# Altium PCB CardioBit 12-Lead PoC Routed PCB.pcbdoc (part 1 of 2)
Units mm, origin at the board's own origin, x right, y up, seen from the top; angles counter-clockwise.
Board outline 307.5 x 200 mm, 2 copper layers (Top Layer, Bottom Layer); 149 components, 164 nets, 497 pads, 199 vias.
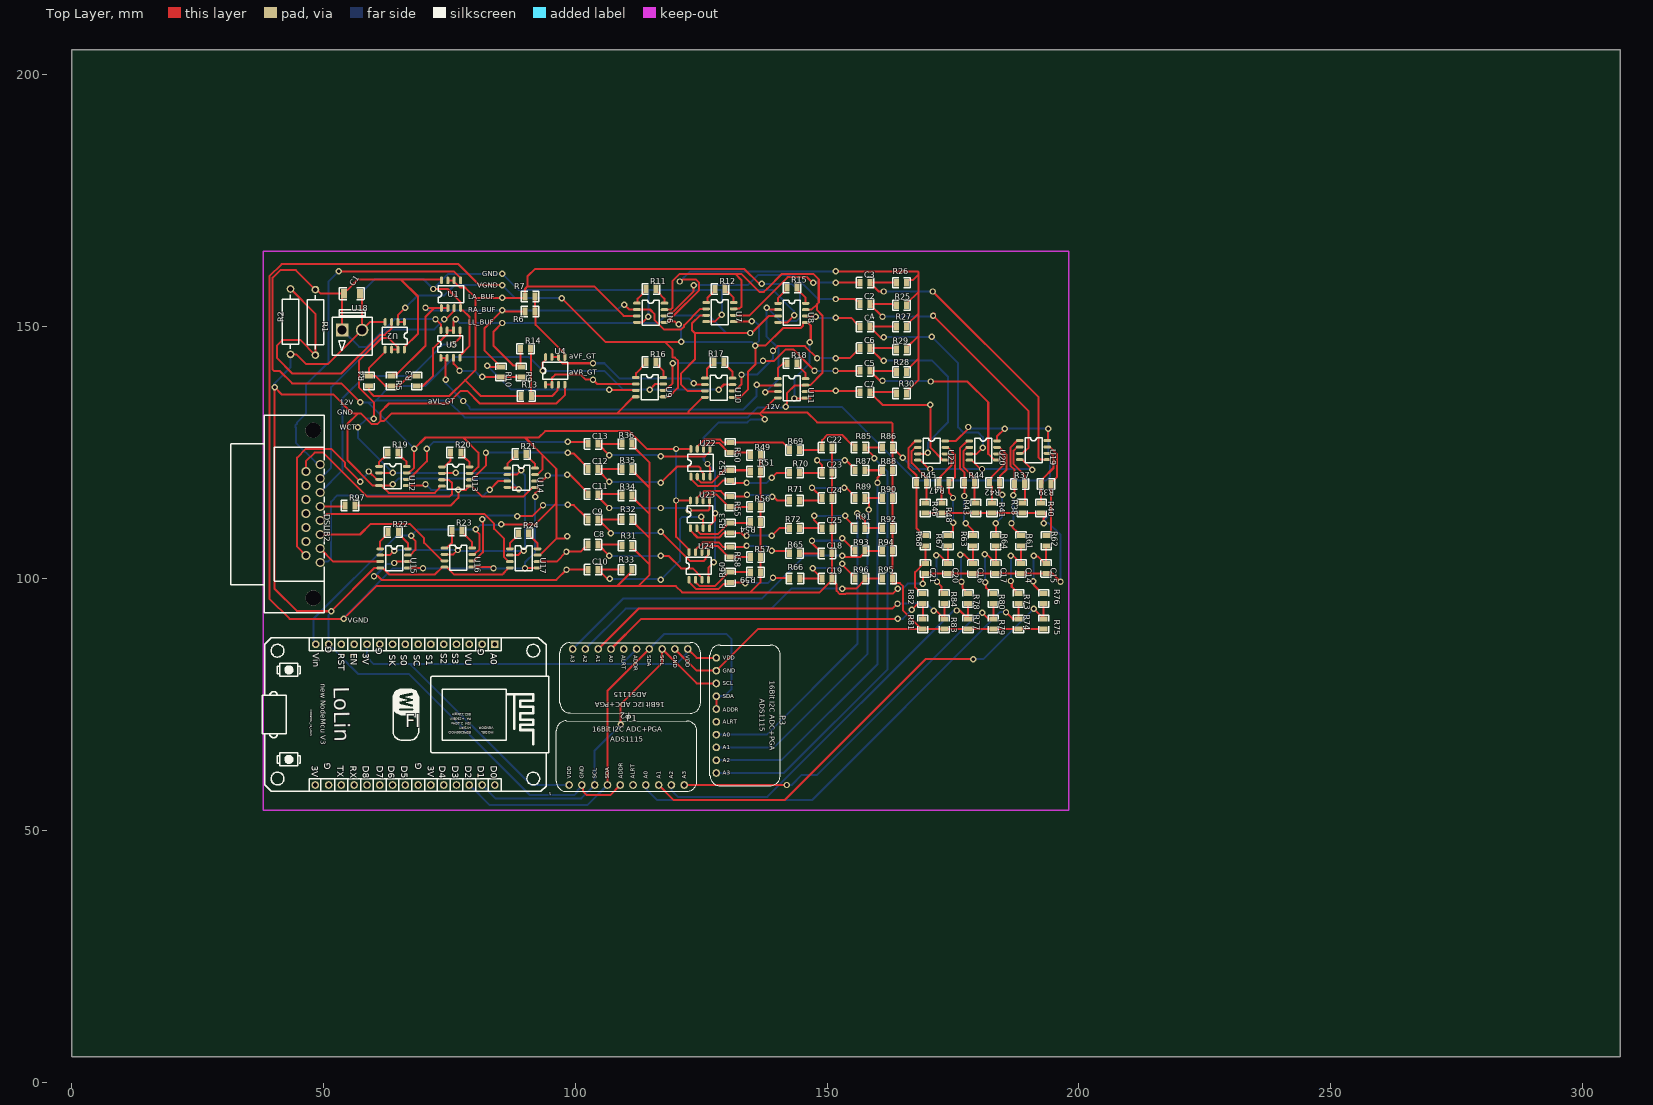
[diagram p0: Top Layer view]
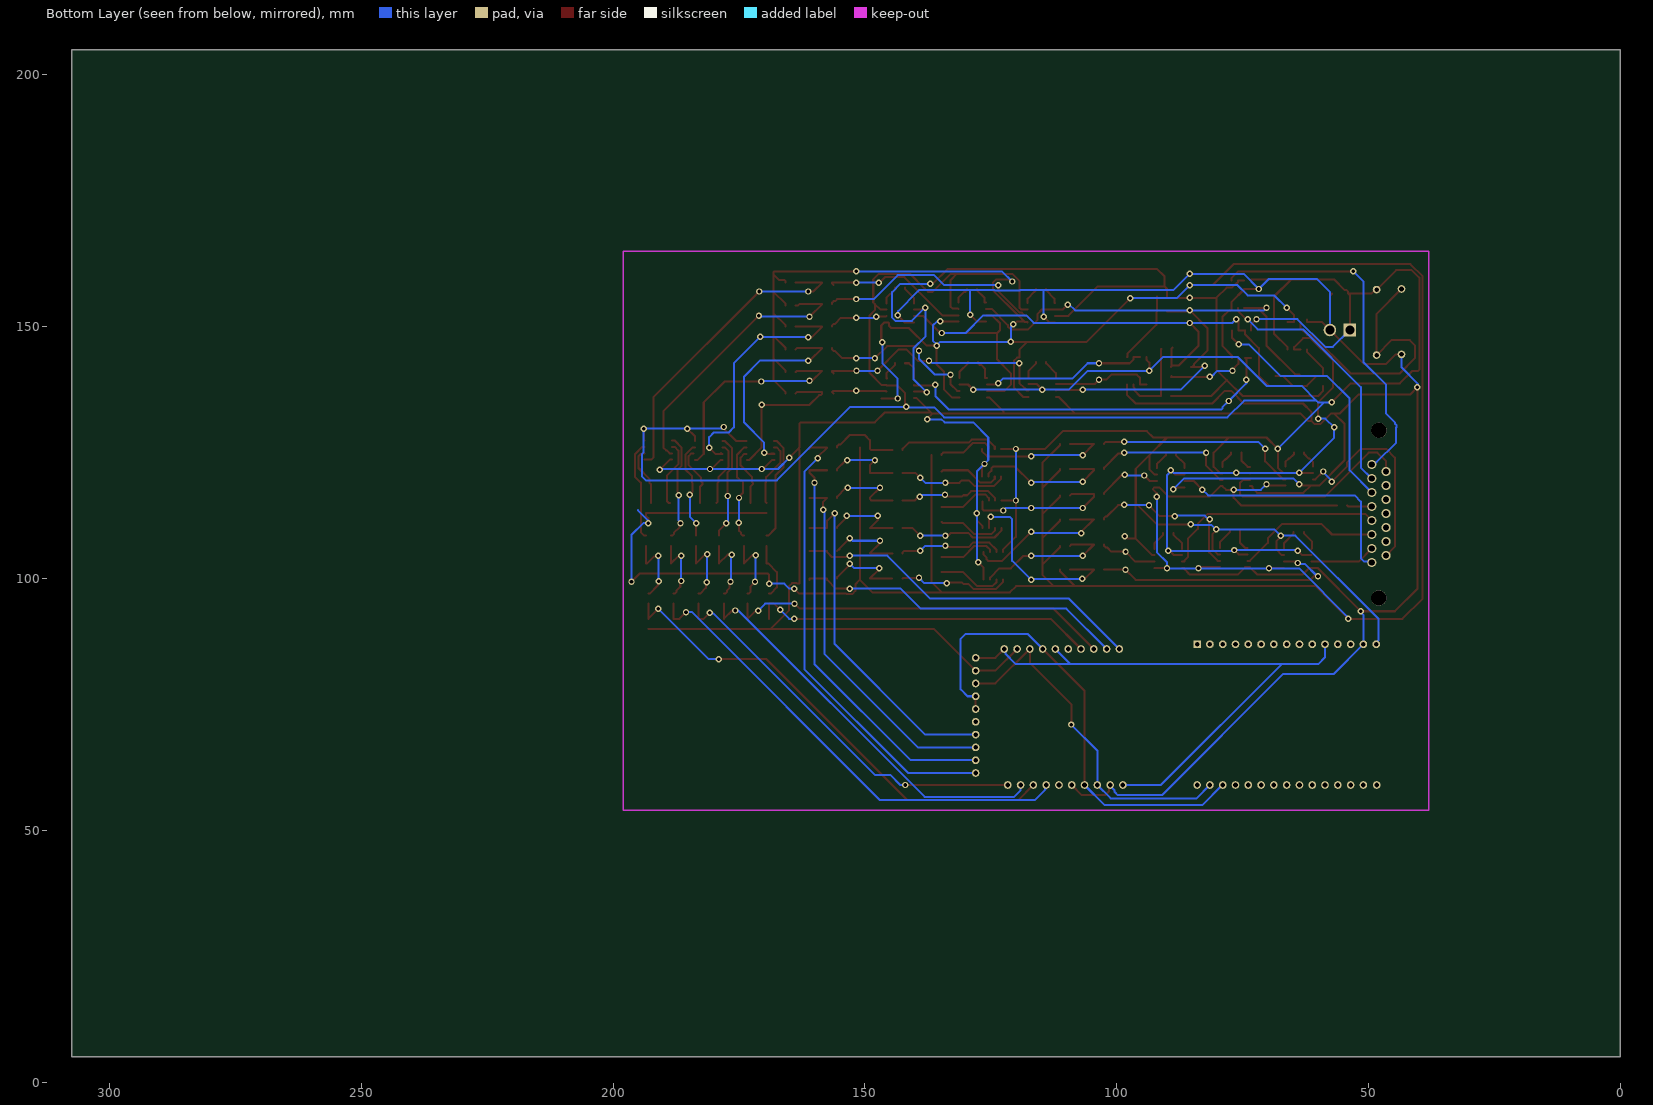
[diagram p1: Bottom Layer view, seen from below]

## Layer stack, top to bottom
Top Solder: solder mask 0.0102, Solder Resist, Dk 3.5
Top Layer: signal copper 0.0356
Dielectric1: dielectric 0.32, FR-4, Dk 4.8
Bottom Layer: signal copper 0.0356
Bottom Solder: solder mask 0.0102, Solder Resist, Dk 3.5

## Board outline
0,5 0,205 307.5,205 307.5,5

## Design rules (kind name [scope] priority, off if disabled: settings)
Clearance [All] p1: gap=0.254 ignorepadtopadclearanceinfootprint=FALSE except(0: Arc-Hole Track-Hole SMDPad-Hole THPad-Hole Via-Hole Fill-Hole Poly-Hole Region-Hole Text-Hole)
HoleSize [All] p1: absolutevalues=TRUE maxlimit=2.54 minlimit=0.3 maxpercent=80.000 minpercent=20.000
HoleToHoleClearance [All] p1: gap=0.3 allowstackedmicrovias=TRUE
MinimumSolderMaskSliver [All] p1: minsoldermaskwidth=0.3
PolygonConnect [All] p1: connectstyle=Relief reliefconductorwidth=0.254 reliefentries=4 polygonreliefangle="90 Angle" airgapwidth=0.254
RoutingVias [All] p1: holewidth=0.711 width=1.27 viastyle="Through Hole" minholewidth=0.711 minwidth=1.27 maxholewidth=0.711 maxwidth=1.27
SilkToSilkClearance [All] p1: silktosilkclearance=0.3
SilkToSolderMaskClearance [IsPad] p1: minsilkscreentomaskgap=0.3 clearancetoexposedcopper=TRUE
SolderMaskExpansion [All] p1: expansion=0.102 istentingtop=FALSE
Width [All] p1: maxlimit=0.5 minlimit=0.3 preferedwidth=0.4
25 further rules are at their usual default settings.

## Components (designator, comment, footprint, x,y, rotation, side; value= is the part's Value field where it differs from the comment)
C1 "1uF" C1206 55.626,156.591 r0 top
C2 "10uF" C0805 157.5,154.5 r0 top
C3 "10uF" C0805 157.5,158.75 r0 top
C4 "10uF" C0805 157.5,150 r0 top
C5 "10uF" C0805 157.5,141.25 r0 top
C6 "10uF" C0805 157.5,145.75 r0 top
C7 "10uF" C0805 157.5,137 r0 top
C8 "10uF" C0805 103.5,106.75 r0 top
C9 "10uF" C0805 103.5,111.75 r0 top
C10 "10uF" C0805 103.5,101.75 r0 top
C11 "10uF" C0805 103.5,116.75 r0 top
C12 "10uF" C0805 103.5,121.75 r0 top
C13 "10uF" C0805 103.5,126.75 r0 top
C14 "1uF" C0805 188.5,102 r270 top
C15 "1uF" C0805 193.5,102 r270 top
C16 "1uF" C0805 179,102 r270 top
C17 "1uF" C0805 183.5,102 r270 top
C18 "1uF" C0805 150,105 r0 top
C19 "1uF" C0805 150,100 r0 top
C20 "1uF" C0805 174,102 r270 top
C21 "1uF" C0805 169.5,102 r270 top
C22 "1uF" C0805 150,126 r0 top
C23 "1uF" C0805 150,121 r0 top
C24 "1uF" C0805 150,116 r0 top
C25 "1uF" C0805 150,110 r0 top
DSUB2 "DS1037-15FNAKT76-0CC" DSUB-TH_DS1037-15FN 47.92,112.909 r270 top
P1 "ADS1115" "ADS1115 BREAKOUT BOARD NO HOLES" 95.966,57.73 r0 top
P2 "ADS1115" "ADS1115 BREAKOUT BOARD NO HOLES" 125.114,87.27 r180 top
P3 "ADS1115" "ADS1115 BREAKOUT BOARD NO HOLES" 126.73,87.034 r270 top
R1 "100K" RES-TH_BD3.3-L9.0-P13.00-D0.6 48.387,150.876 r270 top
R2 "100K" RES-TH_BD3.3-L9.0-P13.00-D0.6 43.434,151.003 r90 top
R3 "1K" R0805#1 68.5,139.25 r90 top
R4 "1K" R0805#1 59,139.25 r90 top
R5 "1K" R0805#1 63.5,139.25 r270 top
R6 "1K" R0805#1 91,153 r180 top
R7 "1K" R0805#1 91,156 r180 top
R9 "1K" R0805#1 89.25,141 r270 top
R10 "1K" R0805#1 85.25,141 r270 top
R11 "10K" R0805#1 115,157.5 r0 top
R12 "10K" R0805#1 128.75,157.5 r0 top
R13 "1K" R0805#1 90.25,136.25 r0 top
R14 "1K" R0805#1 90.125,145.625 r0 top
R15 "10K" R0805#1 143,157.75 r0 top
R16 "10K" R0805#1 115,143 r0 top
R17 "10K" R0805#1 128.5,143 r0 top
R18 "10K" R0805#1 143,142.75 r0 top
R19 "10K" R0805#1 63.75,125 r0 top
R20 "10K" R0805#1 76.25,125 r0 top
R21 "10K" R0805#1 89.25,124.75 r0 top
R22 "10K" R0805#1 63.837,109.225 r0 top
R23 "8.2K" R0805#1 76.5,109.5 r0 top
R24 "8.2K" R0805#1 89.75,109 r0 top
R25 "300K" R0805#1 164.75,154.25 r180 top
R26 "300K" R0805#1 164.75,158.75 r180 top
R27 "300K" R0805#1 164.75,150 r180 top
R28 "300K" R0805#1 164.75,141 r180 top
R29 "300K" R0805#1 164.75,145.5 r180 top
R30 "300K" R0805#1 164.75,136.75 r180 top
R31 "300K" R0805#1 110.25,106.5 r180 top
R32 "300K" R0805#1 110.25,111.75 r180 top
R33 "300K" R0805#1 110.25,101.75 r180 top
R34 "300K" R0805#1 110.25,116.5 r180 top
R35 "300K" R0805#1 110.25,121.75 r180 top
R36 "300K" R0805#1 110.25,126.75 r180 top
R37 "25K" R0805#1 188.25,118.75 r0 top
R38 "150" R0805#1 188.75,114 r90 top
R39 "25K" R0805#1 193.5,118.75 r180 top
R40 "150" R0805#1 192.5,114 r270 top
R41 "150" R0805#1 182.75,114 r270 top
R42 "25K" R0805#1 183.25,119 r180 top
R43 "150" R0805#1 179.5,114 r90 top
R44 "25K" R0805#1 178.25,119 r0 top
R45 "25K" R0805#1 168.75,119 r0 top
R46 "150" R0805#1 169.5,114 r90 top
R47 "25K" R0805#1 173.25,119 r180 top
R48 "150" R0805#1 172.75,114 r270 top
R49 "150" R0805#1 135.75,124.5 r0 top
R50 "25K" R0805#1 130.75,126 r270 top
R51 "150" R0805#1 135.75,121.25 r180 top
R52 "25K" R0805#1 130.75,120.5 r90 top
R53 "25K" R0805#1 130.75,110 r90 top
R54 "150" R0805#1 135.75,111.25 r180 top
R55 "25K" R0805#1 130.75,115.25 r270 top
R56 "150" R0805#1 135.75,114.25 r0 top
R57 "150" R0805#1 135.75,104.25 r0 top
R58 "25K" R0805#1 130.75,105.25 r270 top
R59 "150" R0805#1 135.75,101.25 r180 top
R60 "25K" R0805#1 130.75,100.25 r90 top
R61 "2K" R0805#1 188.5,107.5 r90 top
R62 "2K" R0805#1 193.5,107.5 r90 top
R63 "2K" R0805#1 179,107.5 r90 top
R64 "2K" R0805#1 183.5,107.5 r90 top
R65 "2K" R0805#1 143.5,105 r180 top
R66 "2K" R0805#2 143.592,100 r180 top
R67 "2K" R0805#1 174,107.5 r90 top
R68 "2K" R0805#1 169.5,107.5 r90 top
R69 "2K" R0805#1 143.5,125.5 r180 top
R70 "2K" R0805#1 143.5,121 r180 top
R71 "2K" R0805#1 143.5,115.5 r180 top
R72 "2K" R0805#1 143.5,110 r180 top
R73 "30K" R0805#1 188,96 r90 top
R74 "10K" R0805#1 188,91 r90 top
R75 "10K" R0805#1 193,91 r90 top
R76 "30K" R0805#1 193,96 r90 top
R77 "10K" R0805#1 178,91 r90 top
R78 "30K" R0805#1 178,96 r90 top
R79 "10K" R0805#1 183,91 r90 top
R80 "30K" R0805#1 183,96 r90 top
R81 "10K" R0805#1 169,91 r90 top
R82 "30K" R0805#1 169,96 r90 top
R83 "10K" R0805#1 173.265,90.987 r90 top
R84 "30K" R0805#1 173.265,96.067 r90 top
R85 "30K" R0805#1 156.5,126 r180 top
R86 "10K" R0805#1 162,126 r180 top
R87 "30K" R0805#1 156.5,121.5 r180 top
R88 "10K" R0805#1 162,121.5 r180 top
R89 "30K" R0805#1 156.5,116 r180 top
R90 "10K" R0805#1 162,116 r180 top
R91 "30K" R0805#1 156.5,110 r180 top
R92 "10K" R0805#1 162,110 r180 top
R93 "30K" R0805#1 156.5,105.5 r180 top
R94 "10K" R0805#1 162,105.5 r180 top
R95 "10K" R0805#1 162,100 r180 top
R96 "30K" R0805#1 156.5,100 r180 top
R97 "300K" R0805#1 55.25,114.5 r0 top
U1 "LM358D" SOIC-8_L5.0-W4.0-P1.27-LS6.0-BL 75.311,156.464 r0 top
U2 "LM358D" SOIC-8_L5.0-W4.0-P1.27-LS6.0-BL 64.135,148.209 r180 top
U4 "LM358D" SOIC-8_L5.0-W4.0-P1.27-LS6.0-BL 96,141.25 r0 top
U5 "LM358D" SOIC-8_L5.0-W4.0-P1.27-LS6.0-BL 75.184,146.558 r0 top
U6 "AD623ARZ-R7" SOIC-8_L5.0-W4.0-P1.27-LS6.0-BL 114.958,152.783 r270 top
U7 "AD623ARZ-R7" SOIC-8_L5.0-W4.0-P1.27-LS6.0-BL 128.708,152.913 r270 top
U8 "AD623ARZ-R7" SOIC-8_L5.0-W4.0-P1.27-LS6.0-BL 143,152.75 r270 top
U9 "AD623ARZ-R7" SOIC-8_L5.0-W4.0-P1.27-LS6.0-BL 114.75,138 r270 top
U10 "AD623ARZ-R7" SOIC-8_L5.0-W4.0-P1.27-LS6.0-BL 128.478,137.893 r270 top
U11 "AD623ARZ-R7" SOIC-8_L5.0-W4.0-P1.27-LS6.0-BL 142.978,137.773 r270 top
U12 "AD623ARZ-R7" SOIC-8_L5.0-W4.0-P1.27-LS6.0-BL 63.76,120.345 r270 top
U13 "AD623ARZ-R7" SOIC-8_L5.0-W4.0-P1.27-LS6.0-BL 76.25,120.25 r270 top
U14 "AD623ARZ-R7" SOIC-8_L5.0-W4.0-P1.27-LS6.0-BL 89.25,120 r270 top
U15 "AD623ARZ-R7" SOIC-8_L5.0-W4.0-P1.27-LS6.0-BL 64,104 r270 top
U16 "AD623ARZ-R7" SOIC-8_L5.0-W4.0-P1.27-LS6.0-BL 76.76,104.155 r270 top
U17 "AD623ARZ-R7" SOIC-8_L5.0-W4.0-P1.27-LS6.0-BL 89.75,104 r270 top
U18 "A3961WV-02P" CONN-TH_A3961WV-02P 55.678,149.352 r0 top
U19 "LM358D" SOIC-8_L5.0-W4.0-P1.27-LS6.0-BL 191,125.5 r270 top
U20 "LM358D" SOIC-8_L5.0-W4.0-P1.27-LS6.0-BL 180.99,125.405 r270 top
U21 "LM358D" SOIC-8_L5.0-W4.0-P1.27-LS6.0-BL 170.74,125.405 r270 top
U22 "LM358D" SOIC-8_L5.0-W4.0-P1.27-LS6.0-BL 124.845,122.99 r0 top
U23 "LM358D" SOIC-8_L5.0-W4.0-P1.27-LS6.0-BL 124.75,112.75 r0 top
U24 "LM358D" SOIC-8_L5.0-W4.0-P1.27-LS6.0-BL 124.5,102.5 r0 top
U? "NODEMCU_V3_LOLIN" NODEMCU_V3_LOLIN 66.24,72.97 r270 top

## Footprints (in the part's own frame and the unit in brackets; to place one, negate y for a bottom-side part, rotate by r counter-clockwise, add the part's x,y. Pads: shape width x height; smd on the part's side, far side on the other; paste and mask are expansions set on the pad)
"ADS1115 BREAKOUT BOARD NO HOLES" [mil]
  round 60 hole 36: 1(110,50) 2(210,50) 3(310,50) 4(410,50) 5(510,50) 6(610,50) 7(710,50) 8(810,50) 9(910,50) 10(1010,50)
  silkscreen extent 10,0 1110,551
C0805 [mm]
  rect 1x1.55 smd: 1(-1,0) 2(1,0)
  silkscreen extent -1.75,-1.04 1.75,1.04
C1206 [mm]
  rect 1.2x1.9 smd: 1(-1.6,0) 2(1.6,0)
  silkscreen extent -2.5,-1.2 2.5,1.2
CONN-TH_A3961WV-02P [mm]
  rect 2.5x2.5 hole 1.8: 1(-1.98,0)
  round 2.5 hole 1.8: 2(1.98,0)
  silkscreen extent -3.96,-5 3.96,4
DSUB-TH_DS1037-15FN [mm]
  round 1.8 hole 1.2: 1(-9.731,1.42) 2(-6.949,1.42) 3(-4.171,1.42) 4(-1.389,1.42) 5(1.389,1.42) 6(4.171,1.42) 7(6.949,1.42) 8(9.731,1.42) 9(-8.341,-1.42) 10(-5.56,-1.42) 11(-2.779,-1.42) 12(0,-1.42) 13(2.781,-1.42) 14(5.56,-1.42) 15(8.341,-1.42)
  round 3.06 hole 3.06 unplated: ""(-16.53,0)
  round 3.05 hole 3.05 unplated: ""(16.789,0)
  silkscreen extent -19.47,-16.4 19.73,2.21
NODEMCU_V3_LOLIN [mil]
  rect 60x60 hole 36: 1(-550,700)
  round 60 hole 36: 2(-550,600) 3(-550,500) 4(-550,400) 5(-550,300) 6(-550,200) 7(-550,100) 8(-550,0) 9(-550,-100) 10(-550,-200) 11(-550,-300) 12(-550,-400) 13(-550,-500) 14(-550,-600) 15(-550,-700) 16(550,-704) 17(550,-600) 18(550,-500) 19(550,-400) 20(550,-300) 21(550,-200) 22(550,-100) 23(550,0) 24(550,100) 25(550,200) 26(550,300) 27(550,400) 28(550,500) 29(550,600) 30(550,700)
  silkscreen extent -600,-1120 600,1120
R0805#1 [mm]
  rect 1x1.55 smd: 1(-1,0) 2(1,0)
  silkscreen extent -1.75,-1.02 1.75,1.02
R0805#2 [mm]
  rect 1x1.55 smd: 1(-1,0) 2(1.092,0)
  silkscreen extent -1.75,-1.02 1.75,1.02
RES-TH_BD3.3-L9.0-P13.00-D0.6 [mil]
  round 60 hole 36: 1(-255.91,0) 2(255.9,0)
  silkscreen extent -210,-65 210,65
SOIC-8_L5.0-W4.0-P1.27-LS6.0-BL [mm]
  oval 0.6x1.52 smd: 1(-1.905,-2.74) 2(-0.635,-2.74) 3(0.635,-2.74) 4(1.905,-2.74) 5(1.905,2.74) 6(0.635,2.74) 7(-0.635,2.74) 8(-1.905,2.74)
  silkscreen extent -2.49,-1.67 2.5,1.7

## Via types
v1: diameter 1.27, hole 0.711, Top Layer to Bottom Layer, 199 vias

## Nets (pads, with @x,y where several pads share a name; then routed paths per layer and width w, separated by ;. In a path a pad name is that pad's centre, name@x,y a point inside that pad or via, vN(x,y) a via of type N, cw(c..) or ccw(c..) an arc to the next point about the centre after c; other vN are vias at no path point)
3V3: P1.1 P2.1 P2.5 P3.1 U?.11 | length 120.6
  Top Layer w0.4: P2.1@122.32,86 124.08,84.24 P3.1@128,84.24
  Bottom Layer w0.4: U?.11@58.62,86.94 58.62,84.38 60,83 67.228,83 ; P1.1@98.76,59 91.228,59 67.228,83 ; P2.5@112.16,86 109.16,83 ; P2.1@122.32,86 122.105,85.785 122.105,85.105 120,83 109.16,83 ; 67.228,83 109.16,83
12V: C1.1 R1.1 U1.8 U2.8 U4.8 U5.8 U6.7 U7.7 U8.7 U9.7 U10.7 U11.7 U12.7 U13.7 U14.7 U15.7 U16.7 U17.7 U18.1 U19.8 U20.8 U21.8 U22.8 U23.8 U24.8 U?.15 | length 699.2
  Top Layer w0.4: U18.1@53.698,149.352 53.698,156.263 C1.1@54.026,156.591 ; v1(57.25,135) 53.5,138.75 43.75,138.75 41.25,141.25 40.138,141.25 39.904,141.484 39.904,159.729 41.425,161.25 44.513,161.25 R1.1@48.387,157.376 48.691,157.376 49.476,156.591 C1.1@54.026,156.591 ; U2.8@66.04,145.469 66.04,145.929 68.75,148.639 68.75,156 65.365,159.385 ; U12.7@66.5,120.98 66.96,120.98 68,122.02 v1(68,125.75) 70.25,128 77.75,128 ; U15.7@66.74,104.635 67.2,104.635 68.25,105.685 68.25,107.496 67.451,108.296 v1(67.451,108.531) ; v1(72.23,151.52) 73.279,150.471 U5.8@73.279,149.298 ; U1.8@73.406,159.204 73.406,159.293 73.314,159.385 65.365,159.385 ; U13.7@78.99,120.885 79.45,120.885 80.75,122.185 80.75,125 77.75,128 ; U16.7@79.5,104.79 79.96,104.79 81,105.83 81,108.765 80.25,109.515 v1(80.25,109.75) ; v1(85.25,110.75) 92,110.75 96.125,114.875 96.125,121.875 ; U14.7@91.99,120.635 92.45,120.635 93.5,121.685 93.5,124.5 ; U17.7@92.49,104.635 92.95,104.635 96.25,107.935 ; v1(93.5,141.25) 93.5,142.852 93.995,143.347 93.995,143.376 94.095,143.476 U4.8@94.095,143.99 ; v1(98.356,108.405) 97.886,107.935 96.25,107.935 ; v1(114.75,137.5) 115.885,138.635 U9.7@117.49,138.635 ; U6.7@117.698,153.418 117.736,153.456 118.956,153.456 119.25,153.75 119.25,159 120.75,160.5 131.75,160.5 ; U24.8@122.595,105.24 122.595,105.7 120,108.295 v1(120,115.5) 120.005,115.495 122.84,115.495 U23.8@122.845,115.49 ; U22.8@122.94,125.73 v1(120,125.73) 114.187,125.73 110.667,129.25 94,129.25 92.75,128 90,128 ; v1(128.5,137.5) 129.528,138.528 U10.7@131.218,138.528 ; U7.7@131.448,153.548 131.486,153.586 132.586,153.586 133,154 133,159.25 131.75,160.5 ; v1@141.916,134.666 142,134.75 142,136.75 143.62,138.37 145.68,138.37 U11.7@145.718,138.408 146.658,138.408 149.089,140.839 149.089,152.201 148,153.29 148,154.5 ; U8.7@145.74,153.385 146.885,153.385 148,154.5 ; U21.8@173.48,127.31 175.56,127.31 178,129.75 v1(178,130.089) ; U20.8@183.73,127.31 183.73,128.23 v1(185.25,129.75) ; U19.8@193.74,127.405 193.778,127.405 193.87,127.497 193.87,129.62 193.911,129.661 v1(193.911,129.75) ; C1.1@54.026,156.591 54.026,156.941 54.426,157.341 54.776,157.341 56.82,159.385 65.365,159.385 ; 77.75,128 90,128 ; 90,128 93.5,124.5 ; 93.5,124.5 96.125,121.875 ; 96.125,121.875 96.25,121.75 96.25,107.935 ; 131.75,160.5 132.96,160.5 136.549,156.911 137.451,156.911 138.089,157.549 141.04,160.5 147.25,160.5 148.339,159.411 148.339,154.839 148,154.5
  Bottom Layer w0.4: U?.15@48.46,86.94 48.46,87.244 48,87.704 48,92 64.531,108.531 v1(67.451,108.531) 68.67,109.75 80.329,109.75 81.24,110.661 85.161,110.661 v1(85.25,110.75) ; U18.1@53.698,149.352 57.05,146 58.575,146 64.095,151.52 v1(72.23,151.52) ; v1(57.25,135) 58.75,135 ; v1(68,125.75) 58.75,135 ; v1@98.356,108.356 v1(98.356,108.405) ; v1(120,115.5) v1(120,125.73) ; v1(128.5,137.5) v1(114.75,137.5) 109.493,137.5 105.743,141.25 v1(93.5,141.25) 90.75,144 76,144 70.25,138.25 63.25,138.25 60.339,135.339 ; v1(178,130.089) 178.235,130.089 178.574,129.75 v1(185.25,129.75) 194,129.75 194,125.007 194.25,124.757 194.25,120.25 193.5,119.5 167.5,119.5 152.911,134.089 v1(141.75,134.089) 141.661,134 136.25,134 134.25,132 78,132 74.661,135.339 60.339,135.339 ; 58.75,135 60,135 60.339,135.339
ADC_AVF: P2.7 R81.2 R82.1 | length 68.6
  Top Layer w0.4: P2.7@107.08,86 113.08,92 v1(164,92) ; v1(166.792,93.765) 168.026,95 R82.1@169,95 R81.2@169,92
  Bottom Layer w0.4: v1(164,92) 165.026,92 v1(166.792,93.765)
ADC_AVL: P2.8 R83.2 R84.1 | length 76.8
  Top Layer w0.4: P2.8@104.54,86 112.54,94 162.97,94 v1(163.97,95) ; v1(171.201,93.589) 171.663,93.589 R83.2@173.265,91.987 R84.1@173.265,95.067
  Bottom Layer w0.4: v1(163.97,95) 169.79,95 v1(171.201,93.589)
ADC_AVR: P1.10 R79.2 R80.1 | length 79
  Top Layer w0.4: P1.10@121.62,59 v1(142,59) ; v1(180.845,93.163) 182.008,92 R79.2@183,92 R80.1@183,95
  Bottom Layer w0.4: v1(142,59) 143,59 145,61 148,61 180.031,93.031 180.712,93.031 v1(180.845,93.163)
ADC_L1: P1.7 R73.1 R74.2 | length 94.7
  Top Layer w0.4: v1(185.527,93.325) 186.852,92 R74.2@188,92 R73.1@188,95
  Bottom Layer w0.4: P1.7@114,59 114.18,58.82 114.18,58.054 116.234,56 147,56 184.325,93.325 v1(185.527,93.325)
ADC_L2: P1.8 R75.2 R76.1 | length 97.3
  Top Layer w0.4: P1.8@116.54,59 119.54,56 141.54,56 169.54,84 v1(179,84) ; v1(191,94) R75.2@193,92 R76.1@193,95
  Bottom Layer w0.4: v1(179,84) 181,84 v1(191,94)
ADC_L3: P1.9 R77.2 R78.1 | length 79.5
  Top Layer w0.4: v1(175.759,93.648) 176.352,93.648 R77.2@178,92 R78.1@178,95
  Bottom Layer w0.4: P1.9@119.08,59 119.08,57.92 120.346,56.654 138.114,56.654 175.108,93.648 v1(175.759,93.648)
ADC_V1: P2.9 R95.2 R96.1 | length 65.2
  Top Layer w0.4: v1(153,98) 155.775,98 157.5,99.725 R96.1@157.5,100 R95.2@161,100 R95.2@161,99.725
  Bottom Layer w0.4: P2.9@102,86 110,94 138.882,94 142.882,98 v1(153,98)
ADC_V2: P2.10 R93.1 R94.2 | length 70
  Top Layer w0.4: v1(153,104.524) 153.235,104.524 153.488,104.271 156.546,104.271 157.5,105.225 R93.1@157.5,105.5 R94.2@161,105.5
  Bottom Layer w0.4: P2.10@99.46,86 109.46,96 137,96 145.524,104.524 v1(153,104.524)
ADC_V3: P3.7 R91.1 R92.2 | length 68.6
  Top Layer w0.4: v1(156,113) 157.5,111.5 R91.1@157.5,110 R92.2@161,110
  Bottom Layer w0.4: P3.7@128,69 138,69 156,87 v1(156,113)
ADC_V4: P3.8 R89.1 R90.2 | length 72.6
  Top Layer w0.4: v1(158.279,113.643) 158.279,115.221 R89.1@157.5,116 R90.2@161,116
  Bottom Layer w0.4: P3.8@128,66.46 139.46,66.46 158,85 158,113.128 158.279,113.407 v1(158.279,113.643)
ADC_V5: P3.9 R87.1 R88.2 | length 82.3
  Top Layer w0.4: R87.1@157.5,121.5 R88.2@161,121.5 161,121 160,120 v1(160,119)
  Bottom Layer w0.4: P3.9@128,63.92 140.92,63.92 160,83 v1(160,119)
ADC_V6: P3.10 R85.1 R86.2 | length 92.2
  Top Layer w0.4: v1(159.336,123.899) 159.336,124.164 R85.1@157.5,126 R86.2@161,126 R86.2@161,125.725
  Bottom Layer w0.4: P3.10@128,61.38 141.38,61.38 162,82 162,121.23 159.336,123.894 v1(159.336,123.899)
AMP_AVF: R45.1 R68.2 U21.1 | length 21.4
  Top Layer w0.4: U21.1@168,127.31 167.54,127.31 166.132,125.902 166.132,122.118 167.75,120.5 R45.1@167.75,119 167.75,109.975 169.225,108.5 R68.2@169.5,108.5
AMP_AVL: R47.1 R67.2 U21.7 | length 20.1
  Top Layer w0.4: U21.7@173.48,126.04 173.94,126.04 175.348,124.632 175.348,120.098 174.75,119.5 174.55,119.5 174.25,119.2 R47.1@174.25,119 174.25,116.985 175,116.235 v1(175,116) ; R67.2@174,108.5 174.275,108.5 174.575,108.8 174.575,109.075 175.031,109.531 v1(175.031,111.09)
  Bottom Layer w0.4: v1(175,116) 175.031,115.969 v1(175.031,111.09)
AMP_AVR: R42.1 R64.2 U20.7 | length 19.9
  Top Layer w0.4: R64.2@183.5,108.5 v1(183.5,111) ; U20.7@183.73,126.04 184.2,126.04 185.654,124.586 185.654,121.654 184.375,120.375 184.375,119.125 R42.1@184.25,119 184.25,117.156 v1(184.758,116.648)
  Bottom Layer w0.4: v1(183.5,111) 184.758,112.258 v1(184.758,116.648)
AMP_L1: R37.1 R61.2 U19.1 | length 21.5
  Top Layer w0.4: v1(186.61,110.958) 186.777,110.792 186.777,110.223 187.925,109.075 187.925,108.8 188.225,108.5 R61.2@188.5,108.5 ; v1(187,116.5) 187,117 187.25,117.25 R37.1@187.25,118.75 187.25,121.575 186.392,122.433 186.392,125.997 187.8,127.405 U19.1@188.26,127.405
  Bottom Layer w0.4: v1(186.61,110.958) 186.61,111.179 187,111.568 v1(187,116.5)
AMP_L2: R39.1 R62.2 U19.7 | length 19.7
  Top Layer w0.4: R62.2@193.5,108.5 193.775,108.5 194.5,109.225 R39.1@194.5,118.75 194.5,119.025 195.608,120.133 195.608,124.727 194.2,126.135 U19.7@193.74,126.135
AMP_L3: R44.1 R63.2 U20.1 | length 21
  Top Layer w0.4: v1(177.215,116.384) 177.25,116.419 R44.1@177.25,119 177.25,121.075 176.382,121.943 176.382,125.902 177.79,127.31 U20.1@178.25,127.31 ; v1(177.5,111) 179,109.5 R63.2@179,108.5
  Bottom Layer w0.4: v1(177.215,116.384) 177.215,111.285 v1(177.5,111)
AMP_V1: R60.1 R66.2 U24.1 | length 22.1
  Top Layer w0.4: U24.1@122.595,99.76 122.595,99.3 124.003,97.892 128.392,97.892 129.45,98.95 130.45,98.95 R60.1@130.75,99.25 133.533,99.25 133.694,99.089 v1(133.76,99.089) ; v1(139.25,100.133) 142.367,100.133 R66.2@142.5,100
  Bottom Layer w0.4: v1(133.76,99.089) 138.206,99.089 v1(139.25,100.133)
AMP_V2: R58.1 R65.2 U24.7 | length 20.9
  Top Layer w0.4: U24.7@123.865,105.24 123.865,105.7 125.273,107.108 128.542,107.108 129.4,106.25 R58.1@130.75,106.25 133.75,106.25 v1(134,106.5) ; v1(139,105.5) 142.2,105.5 142.5,105.2 R65.2@142.5,105
  Bottom Layer w0.4: v1(134,106.5) 138,106.5 v1(139,105.5)
AMP_V3: R53.1 R72.2 U23.1 | length 21.9
  Top Layer w0.4: U23.1@122.845,110.01 122.845,109.55 124.253,108.142 128.542,108.142 129.4,109 R53.1@130.75,109 133,109 133.5,108.5 v1(134,108.5) ; v1(139,108.5) 140.5,110 R72.2@142.5,110
  Bottom Layer w0.4: v1(134,108.5) v1(139,108.5)
AMP_V4: R55.1 R71.2 U23.7 | length 20.5
  Top Layer w0.4: U23.7@124.115,115.49 124.115,115.95 125.523,117.358 128.892,117.358 129.713,116.537 130.463,116.537 R55.1@130.75,116.25 133.74,116.25 v1(134.092,116.602) ; v1(139.139,116.27) 139.346,116.27 140.116,115.5 R71.2@142.5,115.5
  Bottom Layer w0.4: v1(134.092,116.602) 138.806,116.602 v1(139.139,116.27)
AMP_V5: R52.1 R70.2 U22.1 | length 22.1
  Top Layer w0.4: U22.1@122.94,120.25 122.94,119.79 124.348,118.382 128.271,118.382 129.389,119.5 R52.1@130.75,119.5 131.25,119 v1(134,119) ; v1(139,120) 140,121 R70.2@142.5,121
  Bottom Layer w0.4: v1(134,119) 138,119 v1(139,120)
AMP_V6: R50.1 R69.2 U22.7 | length 20.4
  Top Layer w0.4: U22.7@124.21,125.73 124.21,126.19 125.618,127.598 128.802,127.598 129.4,127 R50.1@130.75,127 141.275,127 142.5,125.775 R69.2@142.5,125.5
AVF_GT: U4.6 U4.7 U10.2 | length 32.9
  Top Layer w0.4: U4.7@95.365,143.99 U4.6@96.635,143.99 96.635,143.53 97.415,142.75 v1(103.5,142.75) ; v1(123.5,138.75) 123.735,138.75 123.957,138.528 U10.2@125.738,138.528
  Bottom Layer w0.4: v1(103.5,142.75) 105.75,142.75 108.75,139.75 122.5,139.75 v1(123.5,138.75)
AVL_GT: U5.1 U5.2 U11.2 | length 78.2
  Top Layer w0.4: U5.1@73.279,143.818 U5.2@74.549,143.818 74.25,143.519 v1(74.25,139.5) ; v1(136,138.5) 136.13,138.37 140.2,138.37 U11.2@140.238,138.408
  Bottom Layer w0.4: v1(74.25,139.5) 74.25,138.75 v1(77.75,135.25) 79,134 79,133.734 79.188,133.546 133.296,133.546 136,136.25 v1(136,138.5)
AVR_GT: U4.1 U4.2 U9.2 | length 20.3
  Top Layer w0.4: U4.1@94.095,138.51 U4.2@95.365,138.51 95.365,139.865 96,140.5 101.035,140.5 102.035,139.5 v1(103.5,139.5) 103.517,139.5 104.382,138.635 U9.2@112.01,138.635
DSUB2_4: DSUB2.4 R97.1 | length 5
  Top Layer w0.4: DSUB2.4@49.34,114.298 54.048,114.298 R97.1@54.25,114.5
DSUB2_10: DSUB2.10
DSUB2_11: DSUB2.11
DSUB2_12: DSUB2.12
DSUB2_13: DSUB2.13
DSUB2_14: DSUB2.14
GND: C1.2 P1.2 P1.5 P2.2 P3.2 R2.1 R74.1 R75.1 R77.1 R79.1 R81.1 R83.1 R86.1 R88.1 R90.1 R92.1 R94.1 R95.1 U1.4 U2.4 U4.4 U5.4 U6.4 U7.4 U8.4 U9.4 U10.4 U11.4 U12.4 U13.4 U14.4 U15.4 U16.4 U17.4 U18.2 U19.4 U20.4 U21.4 U22.4 U23.4 U24.4 U?.14 | length 815.3
  Top Layer w0.4: v1@40.295,137.956 41.75,136.5 52,136.5 55.75,132.75 56.75,132.75 ; v1(40.339,138) 40.25,137.911 40.25,98 44.75,93.5 v1(51.5,93.5) 60.095,102.095 61.72,102.095 63,100.815 72.125,100.815 73.56,102.25 U16.4@74.02,102.25 74.48,102.25 75.98,100.75 85.496,100.75 85.73,100.984 85.73,101.038 86.512,101.819 86.512,102.003 86.604,102.095 U17.4@87.01,102.095 ; R2.1@43.434,144.503 44.6,144.503 46.482,142.621 50.927,142.621 57.626,149.32 57.626,156.191 C1.2@57.226,156.591 ; U18.2@57.658,149.352 59.255,150.949 U2.4@62.23,150.949 U2.4@62.23,151.44 ; v1(63.75,118.75) 63.515,118.75 63.205,118.44 U12.4@61.48,118.44 ; v1(71.75,157.5) 74.607,157.5 77.216,154.891 U1.4@77.216,153.724 77.216,153.35 77.308,153.258 77.682,153.258 79,151.94 79,146.189 77.089,144.278 U5.4@77.089,143.818 ; U13.4@73.51,118.345 73.104,118.345 73.012,118.253 73.012,117.93 72.082,117 62.92,117 U12.4@61.48,118.44 ; U14.4@86.51,118.095 88.405,118.095 v1(88.75,117.75) ; U4.4@97.905,138.51 97.905,136.405 96.25,134.75 81,134.75 78.5,137.25 77.25,137.25 74.75,134.75 63,134.75 61.339,133.089 61.339,131.299 ; P1.2@101.3,59 101.515,58.785 101.515,57.719 102.234,57 106.92,57 P1.5@108.92,59 ; U9.4@112.01,136.095 111.55,136.095 108.205,132.75 ; U6.4@112.218,150.878 113.378,150.878 v1(114.5,152) ; P2.2@119.78,86 124.08,81.7 P3.2@128,81.7 136.3,90 R81.1@168.725,90 ; U10.4@125.738,135.988 125.278,135.988 122.5,133.21 122.5,132.75 ; U7.4@125.968,151.008 127.722,151.008 v1(129.085,152.371) ; v1(126.25,122.75) 126.25,122.515 126.75,122.015 U22.4@126.75,120.25 ; U24.4@126.405,99.76 126.405,102.155 v1(127.5,103.25) ; U23.4@126.655,110.01 126.655,110.47 127.75,111.565 v1(127.75,113) ; v1(137.617,131.627) 137.617,131.793 136.66,132.75 ; U11.4@140.238,135.868 139.778,135.868 136.91,133 ; U8.4@140.26,150.845 142.095,150.845 v1(143.5,152.25) ; v1(165,124) 163.138,125.862 R86.1@163.084,125.809 ; U21.4@168,123.5 168.46,123.5 v1@170.044,121.916 ; U20.4@178.25,123.5 178.71,123.5 v1@180.294,121.916 ; U19.4@188.26,123.595 188.736,123.595 190.694,121.637 v1(190.711,121.637) ; R75.1@193,90 R74.1@188,90 R79.1@183,90 R77.1@178,90 177.994,89.994 173.272,89.994 R83.1@173.265,89.987 173.259,89.994 169.006,89.994 R81.1@169,90 R81.1@168.725,90 ; 56.75,132.75 57.46,132.75 59.549,130.661 60.701,130.661 61.339,131.299 ; 56.75,132.75 54.75,130.75 54.75,123.5 59.81,118.44 U12.4@61.02,118.44 U12.4@61.48,118.44 ; 61.339,131.299 62.026,131.299 63.477,132.75 108.205,132.75 ; 108.205,132.75 122.5,132.75 ; 122.5,132.75 136.66,132.75 ; 136.66,132.75 136.91,133 ; 136.91,133 146,133 148,131 162.766,131 163,130.766 R86.1@163,126 163.084,125.916 R86.1@163.084,125.809 ; R86.1@163.084,125.809 163.084,125.584 163,125.5 R88.1@163,121.5 R90.1@163,116 R92.1@163,110 R94.1@163,105.5 R95.1@163,100 163,99.025 163.485,99.025 163.549,99.089 164.451,99.089 165.089,98.451 165.089,93.636 R81.1@168.725,90
  Bottom Layer w0.4: v1(40.339,138) 40.166,138.173 40.166,138.666 43.434,141.934 R2.1@43.434,144.503 ; v1(51.5,93.5) 51.5,93.265 51,92.765 U?.14@51,86.94 56.94,81 67,81 91,57 99.766,57 100.425,57.66 100.425,57.949 101.3,58.823 P1.2@101.3,59 ; U18.2@57.658,149.352 57.658,156.908 60.25,159.5 69.75,159.5 v1(71.75,157.5) 74.75,160.5 v1(85.5,160.5) 88.75,157.25 114.5,157.25 ; v1(63.75,118.75) 64.839,119.839 86.661,119.839 v1(88.75,117.75) ; v1(114.5,152) 114.5,157.25 ; v1(127.5,103.25) 127.75,103.5 v1(127.75,113) 127.75,121.25 v1(126.25,122.75) 125.5,123.5 125.5,128 128.5,131 134.175,131 134.801,131.627 v1(137.617,131.627) ; v1(129.085,152.371) 129.085,157.25 ; v1(143.5,152.25) 143.41,152.34 143.41,153.106 139.5,157.016 139.266,157.25 129.085,157.25 ; v1(165,124) 167.25,121.75 v1(170.5,121.75) v1(180.75,121.75) 190.598,121.75 v1(190.711,121.637) ; 114.5,157.25 119.181,157.25 119.27,157.161 124.133,157.161 124.222,157.25 129.085,157.25
HPAVF: C6.2 R29.2 U21.3 | length 42.7
  Top Layer w0.4: v1(161.25,143.25) 161,143.25 C6.2@158.5,145.75 163.5,145.75 R29.2@163.75,145.5 ; U21.3@168.643,124.808 168.038,124.808 U21.3@168,124.77 169.535,124.77 169.765,125 v1(170,125)
  Bottom Layer w0.4: v1(161.25,143.25) 170.858,143.25 174,140.108 174,131 170,127 v1(170,125)
HPAVL: C7.2 R30.2 U21.5 | length 31
  Top Layer w0.4: R30.2@163.75,136.75 163.5,137 C7.2@158.5,137 158.5,136.725 158.8,136.425 159.075,136.425 161,134.5 v1(170.5,134.5) 170.5,126.04 173.002,123.538 U21.5@173.442,123.538
HPAVR: C5.2 R28.2 U20.5 | length 43.9
  Top Layer w0.4: v1(161,139.25) 160.5,139.25 C5.2@158.5,141.25 163.5,141.25 R28.2@163.75,141 ; v1(170.606,139.129) 177.871,139.129 182,135 182,124.77 183.27,123.5 U20.5@183.73,123.5
  Bottom Layer w0.4: v1(161,139.25) 170.485,139.25 v1(170.606,139.129)
HPL1: C2.2 R25.2 U19.3 | length 55.8
  Top Layer w0.4: v1(161,152) C2.2@158.5,154.5 163,154.5 163.25,154.25 R25.2@163.75,154.25 ; v1@171.315,152.662 171.036,152.383 v1(171.036,152.147) 190,133.183 190,126 189.469,125.469 189.378,125.469 188.774,124.865 U19.3@188.26,124.865
  Bottom Layer w0.4: v1(161,152) 170.888,152 v1(171.036,152.147)
HPL2: C3.2 R26.2 U19.5 | length 62.1
  Top Layer w0.4: v1(161.25,157) 160.25,157 C3.2@158.5,158.75 R26.2@163.75,158.75 ; v1(171,157) 192,136 192,124 192.405,123.595 U19.5@193.74,123.595
  Bottom Layer w0.4: v1(161.25,157) v1(171,157)
HPL3: C4.2 R27.2 U20.3 | length 49.6
  Top Layer w0.4: v1(161.211,147.91) 160.59,147.91 C4.2@158.5,150 R27.2@163.75,150 ; U20.3@178.25,124.77 179.681,124.77 v1(180.911,126) ; U20.3@178.51,124.865 U20.3@178.548,124.903
  Bottom Layer w0.4: v1(161.211,147.91) 161.3,148 v1(170.75,148) 176,142.75 176,130 177,129 180,129 180.911,128.089 v1(180.911,126)
HPV1: C8.2 R31.2 U24.3 | length 28.6
  Top Layer w0.4: v1(106.75,104.5) C8.2@104.5,106.75 109,106.75 R31.2@109.25,106.5 ; v1(117,104.5) 118.5,104.5 121,102 123.325,102 125.135,100.19 U24.3@125.135,99.76
  Bottom Layer w0.4: v1(106.75,104.5) v1(117,104.5)
HPV2: C9.2 R32.2 U24.5 | length 31.6
  Top Layer w0.4: v1(107,109) 107,109.25 C9.2@104.5,111.75 R32.2@109.25,111.75 ; v1(117,109.25) 122.75,103.5 125.5,103.5 125.801,103.801 125.801,104.122 126.405,104.726 U24.5@126.405,105.24
  Bottom Layer w0.4: v1(107,109) 116.75,109 v1(117,109.25)
HPV3: C10.2 R33.2 U23.3 | length 38.5
  Top Layer w0.4: v1(106.837,99.915) 106.335,99.915 C10.2@104.5,101.75 R33.2@109.25,101.75 ; v1(125,112.25) 125,112.015 125.385,111.63 U23.3@125.385,110.01
  Bottom Layer w0.4: v1(106.837,99.915) 116.835,99.915 v1(117,99.75) 120.75,103.5 120.75,111.766 121.234,112.25 v1(125,112.25)
HPV4: C11.2 R34.2 U23.5 | length 30.5
  Top Layer w0.4: v1(106.75,114) 104.5,116.25 C11.2@104.5,116.75 109,116.75 R34.2@109.25,116.5 ; v1(117,114) v1@117.166,113.834 ; v1(122.5,113.5) 126.382,113.5 126.617,113.734 126.617,115.222 U23.5@126.655,115.26
  Bottom Layer w0.4: v1(106.75,114) v1(117,114) 122,114 v1(122.5,113.5)
HPV5: C12.2 R35.2 U22.3 | length 29.8
  Top Layer w0.4: v1(106.75,119.25) 104.5,121.5 C12.2@104.5,121.75 R35.2@109.25,121.75 ; v1(117,119) 120.25,122.25 124.5,122.25 124.876,121.874 124.876,121.368 125.48,120.764 U22.3@125.48,120.25
  Bottom Layer w0.4: v1(106.75,119.25) 106.875,119.125 116.875,119.125 v1(117,119)